# Altium PCB Shield.PcbDoc
Units mm, origin at the board's own origin, x right, y up, seen from the top; angles counter-clockwise.
Board outline 41.78 x 38.9 mm, 2 copper layers (Top Layer, Bottom Layer), stack 1.57 mm thick; 3 components, 17 nets, 201 pads, 0 vias.
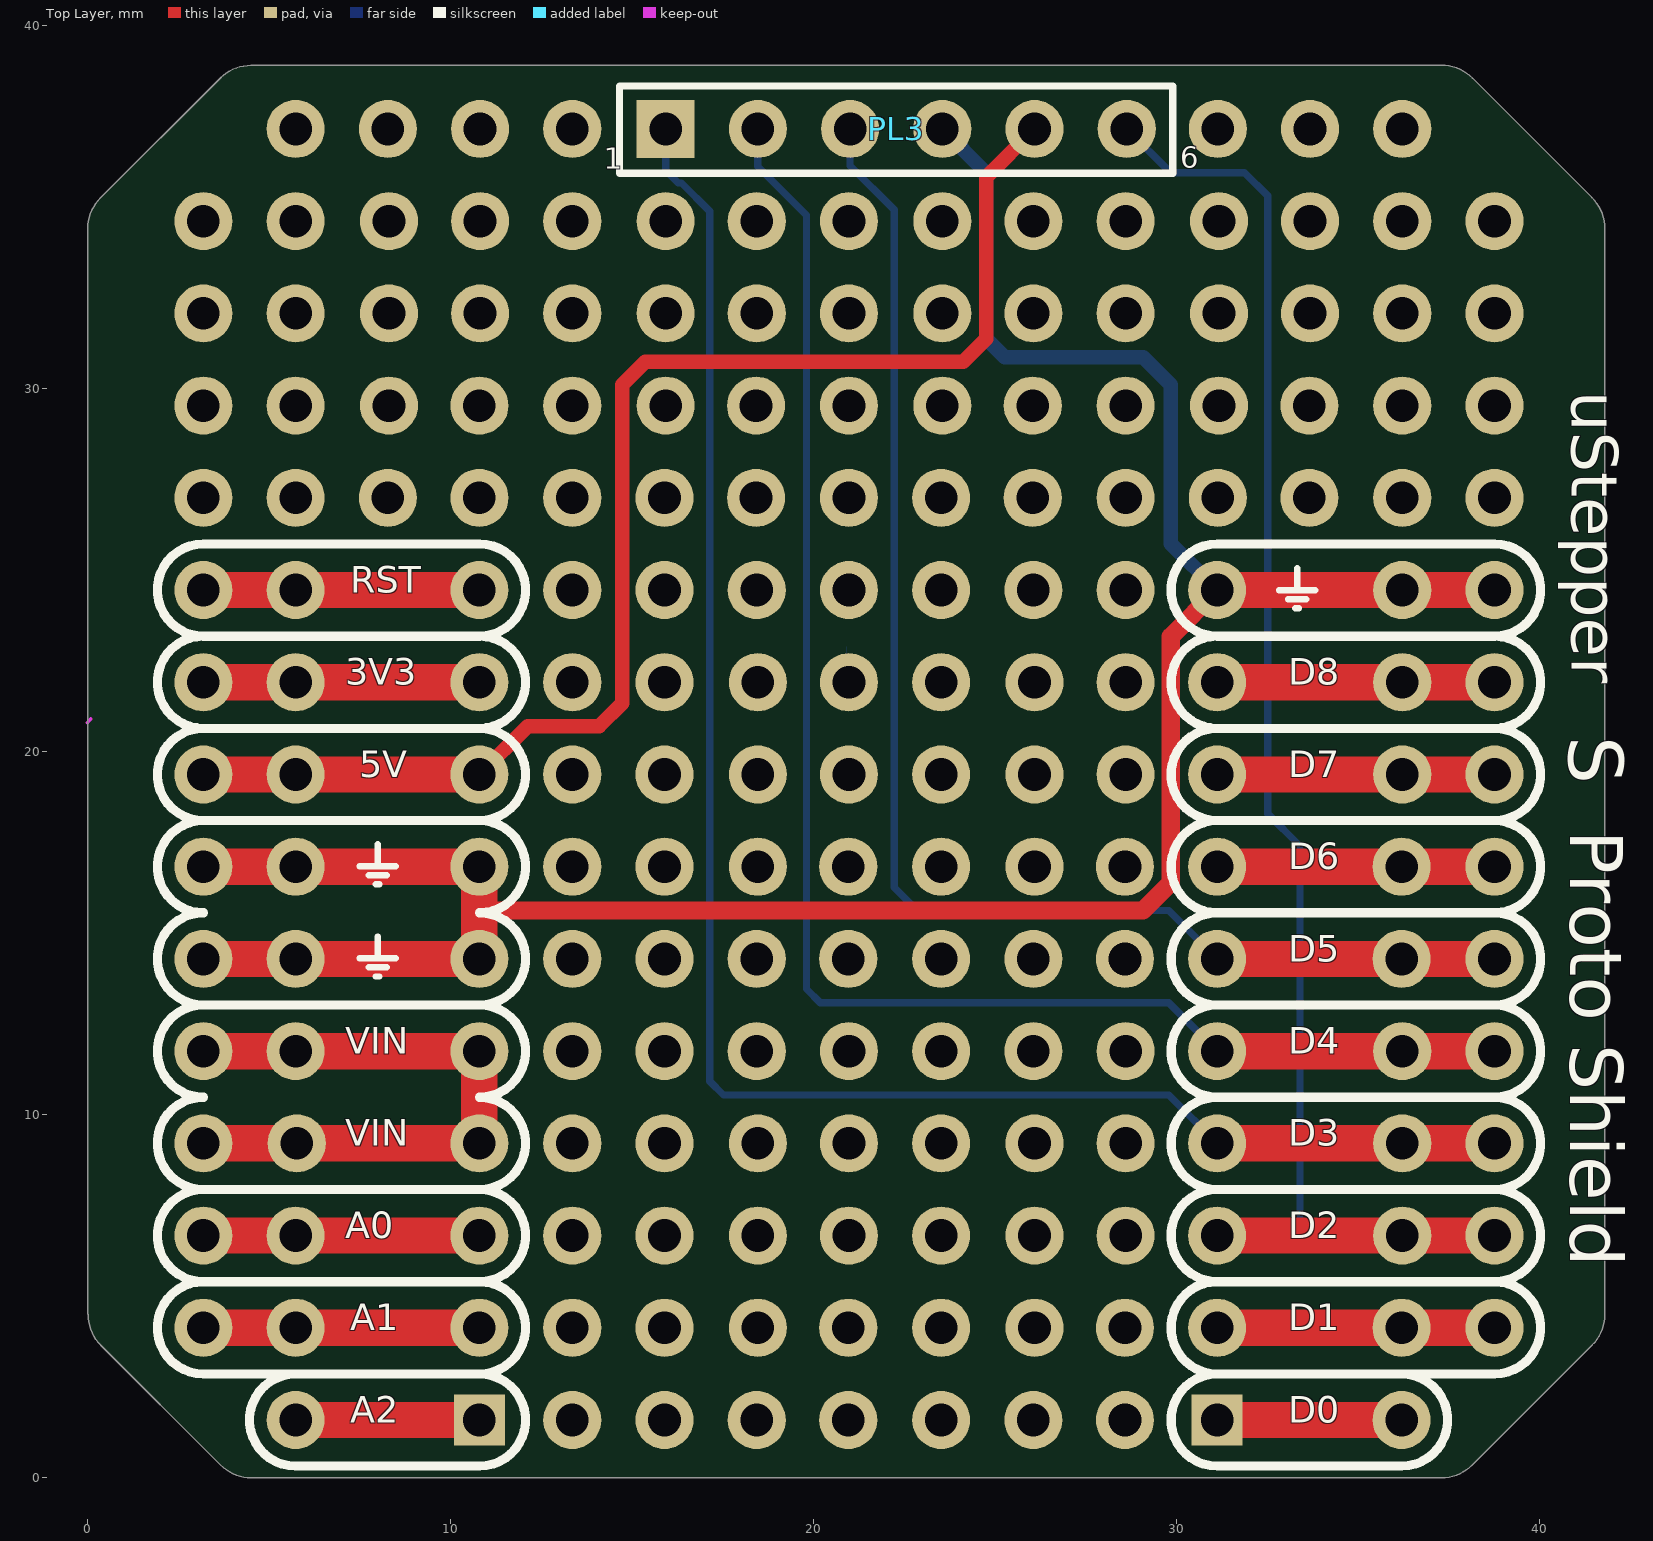
[diagram p0: Top Layer view]
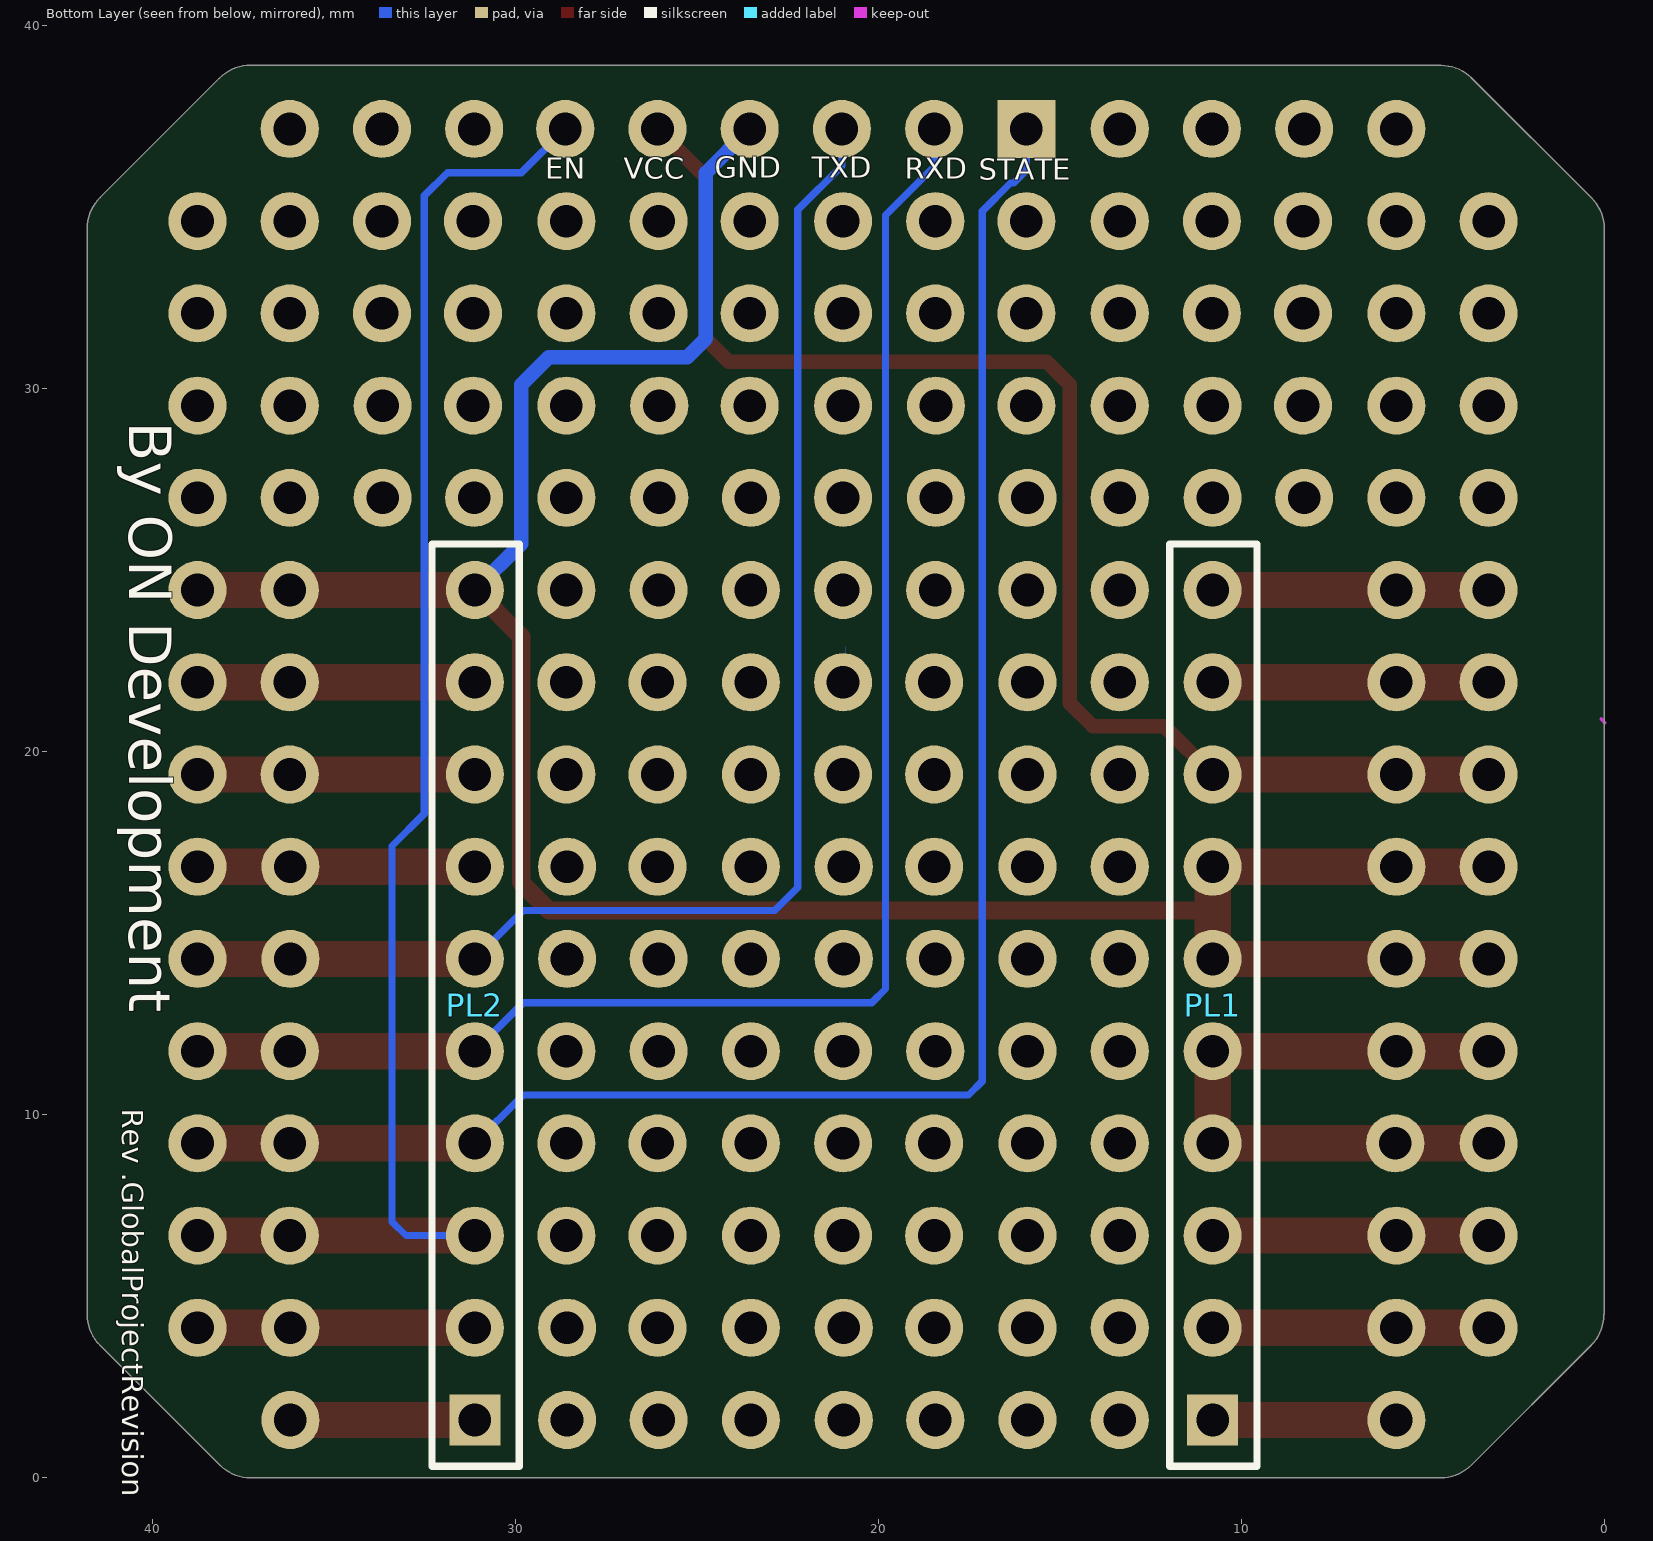
[diagram p1: Bottom Layer view, seen from below]

## Layer stack, top to bottom
Top Solder: solder mask 0.0102, Solder Resist, Dk 3.5
Top Layer: signal copper 0.035
Dielectric 1: core 1.5, FR-4, Dk 4.2
Bottom Layer: signal copper 0.035
Bottom Solder: solder mask 0.0102, Solder Resist, Dk 3.5

## Board outline
0.373,3.651 3.675,0.349 ccw(c4.524,1.207) 4.518,0 37.304,0 ccw(c37.299,1.207) 38.147,0.349 41.45,3.651 ccw(c40.592,4.5) 41.799,4.5 41.799,34.404 ccw(c40.592,34.404) 41.445,35.258 38.152,38.551 ccw(c37.299,37.697) 37.299,38.904 4.52,38.904 4.516,38.9 ccw(c4.516,37.693) 3.662,38.547 0.369,35.254 ccw(c1.223,34.4) 0.016,34.4 0.016,4.508 0.024,4.5 ccw(c1.231,4.5)

## Design rules (kind name [scope] priority, off if disabled: settings)
Clearance [All] p1: gap=0.153 ignorepadtopadclearanceinfootprint=FALSE
ComponentClearance [All] p1: gap=0 collisioncheckmode=3 verticalgap=0 showdistances=FALSE
PolygonConnect [All] p1: connectstyle=Relief reliefconductorwidth=0.254 reliefentries=4 polygonreliefangle="90 Angle" airgapwidth=0.254
RoutingVias [All] p1: holewidth=0.711 width=1.27 viastyle="Through Hole" minholewidth=0.711 minwidth=1.27 maxholewidth=0.711 maxwidth=1.27
SolderMaskExpansion [All] p1: expansion=0.102
Width [All] p1: maxlimit=5 minlimit=0.153 preferedwidth=0.254
29 further rules are at their usual default settings.

## Components (designator, comment, footprint, x,y, rotation, side; value= is the part's Value field where it differs from the comment)
PL1 "10-pin Male Header 2.54mm" "10-pin 2.54mm header" 10.802,13.019 r90 bottom locked
PL2 "10-pin Male Header 2.54mm" "10-pin 2.54mm header" 31.122,13.019 r90 bottom locked
PL3 "6-pin 2.54mm female right angle" "6-pin 2.54mm header - female right angle" 22.282,37.149 r0 top

## Footprints (in the part's own frame and the unit in brackets; to place one, negate y for a bottom-side part, rotate by r counter-clockwise, add the part's x,y. Pads: shape width x height; smd on the part's side, far side on the other; paste and mask are expansions set on the pad)
"6-pin 2.54mm header - female right angle" [mm]
  rect 1.6x1.6 hole 0.9: 1(-6.35,0)
  round 1.6 hole 0.9: 2(-3.81,0) 3(-1.27,0) 4(1.27,0) 5(3.81,0) 6(6.35,0)
  silkscreen extent -7.62,-1.22 7.62,1.18, body extent -7.62,-10.02 10.79,1.91, height 14.8
"10-pin 2.54mm header" [mm]
  rect 1.4x1.4 hole 0.9: 1(-11.43,0)
  round 1.6 hole 0.9: 2(-8.89,0) 3(-6.35,0) 4(-3.81,0) 5(-1.27,0) 6(1.27,0) 7(3.81,0) 8(6.35,0) 9(8.89,0) 10(11.43,0)
  silkscreen extent -12.7,-1.22 12.7,1.18, body extent -12.7,-1.24 12.7,1.24, height 15

## Part data
PL1 PL2: library part CMP-003-0020-0.0, "10 Positions Header Connector 0.100\" (2.54mm) Through Hole Gold"
PL3: library part CMP-003-0023-0.1, "Pin Header 6-pin 2.54mm female right angle"

## Free pads (board coordinates)
  round 1.6 hole 0.9: 2(38.76,34.609) 3(38.76,32.069) 4(38.76,29.529) 5(38.76,26.989) 15(38.76,4.129) 17(38.76,6.669) 18(38.76,9.209) 19(38.76,11.749) 20(38.76,14.289) 21(38.76,16.829) 22(38.76,19.369) 23(38.76,21.909) 24(38.76,24.449) 25(36.22,26.989) 26(36.22,29.529) 27(36.22,32.069) 28(36.22,34.609) 29(36.22,37.149) 30(10.82,37.149) 30(20.98,11.749) 30(20.98,24.449) 30(28.6,11.749) 30(28.6,24.449) 30(33.68,37.149) 30(36.22,11.749) 30(36.22,24.449) 31(10.82,34.609) 31(18.44,34.609) 31(20.98,9.209) 31(20.98,21.909) 31(26.06,34.609) 31(28.6,9.209) 31(28.6,21.909) 31(33.68,34.609) 31(36.22,9.209) 31(36.22,21.909) 32(10.82,32.069) 32(18.44,32.069) 32(20.98,6.669) 32(20.98,19.369) 32(26.06,32.069) 32(28.6,6.669) 32(28.6,19.369) 32(33.68,32.069) 32(36.22,6.669) 32(36.22,19.369) 33(10.802,29.529) 33(18.422,29.529) 33(20.962,4.129) 33(20.962,16.829) 33(26.042,29.529) 33(28.582,4.129) 33(28.582,16.829) 33(33.662,29.529) 33(36.202,4.129) 33(36.202,16.829) 34(10.802,26.989) 34(18.422,26.989) 34(20.962,1.589) 34(20.962,14.289) 34(26.042,26.989) 34(28.582,1.589) 34(28.582,14.289) 34(33.662,26.989) 34(36.202,1.589) 34(36.202,14.289) 35(8.28,37.149) 35(18.44,11.749) 35(18.44,24.449) 35(26.06,11.749) 35(26.06,24.449) 35(31.14,37.149) 36(8.312,34.609) 36(15.932,34.609) 36(18.472,9.209) 36(18.472,21.909) 36(23.552,34.609) 36(26.092,9.209) 36(26.092,21.909) 36(31.172,34.609) 37(8.312,32.069) 37(15.932,32.069) 37(18.472,6.669) 37(18.472,19.369) 37(23.552,32.069) 37(26.092,6.669) 37(26.092,19.369) 37(31.172,32.069) 38(8.312,29.529) 38(15.932,29.529) 38(18.472,4.129) 38(18.472,16.829) 38(23.552,29.529) 38(26.092,4.129) 38(26.092,16.829) 38(31.172,29.529) 39(8.28,26.989) 39(15.9,26.989) 39(18.44,1.589) 39(18.44,14.289) 39(23.52,26.989) 39(26.06,1.589) 39(26.06,14.289) 39(31.14,26.989) 40(3.2,6.669) 40(3.2,16.829) 40(5.74,26.989) 40(13.36,1.589) 40(13.36,14.289) 40(13.36,26.989) 40(15.9,1.589) 40(15.9,14.289) 40(20.98,26.989) 40(23.52,1.589) 40(23.52,14.289) 40(28.6,26.989) 41(3.2,9.209) 41(3.2,19.369) 41(5.74,29.529) 41(13.36,4.129) 41(13.36,16.829) 41(13.36,29.529) 41(15.9,4.129) 41(15.9,16.829) 41(20.98,29.529) 41(23.52,4.129) 41(23.52,16.829) 41(28.6,29.529) 42(3.2,11.749) 42(3.2,21.909) 42(5.74,32.069) 42(13.36,6.669) 42(13.36,19.369) 42(13.36,32.069) 42(15.9,6.669) 42(15.9,19.369) 42(20.98,32.069) 42(23.52,6.669) 42(23.52,19.369) 42(28.6,32.069) 43(3.2,14.289) 43(3.2,24.449) 43(5.74,34.609) 43(13.36,9.209) 43(13.36,21.909) 43(13.36,34.609) 43(15.9,9.209) 43(15.9,21.909) 43(20.98,34.609) 43(23.52,9.209) 43(23.52,21.909) 43(28.6,34.609) 44(5.74,37.149) 44(13.36,11.749) 44(13.36,24.449) 44(13.36,37.149) 44(15.9,11.749) 44(15.9,24.449) 44(23.52,11.749) 44(23.52,24.449) 45(3.2,34.609) 46(3.2,32.069) 47(3.2,29.529) 48(3.2,26.989) 50(3.2,4.129) 53(5.74,1.589) 53(5.74,4.129) 54(5.74,6.669) 55(5.772,9.209) 56(5.74,11.749) 57(5.74,14.289) 58(5.74,16.829) 59(5.74,19.369) 60(5.74,21.909) 61(5.74,24.449)

## Nets (pads, with @x,y where several pads share a name; then routed paths per layer and width w, separated by ;. In a path a pad name is that pad's centre, name@x,y a point inside that pad or via, vN(x,y) a via of type N, cw(c..) or ccw(c..) an arc to the next point about the centre after c; other vN are vias at no path point)
+3V3: pad.42@3.2,21.909 pad.60 PL1.9 | length 7.6
  Top Layer w1: pad.42@3.2,21.909 pad.60 PL1.9
+5V: pad.41@3.2,19.369 pad.59 PL1.8 PL3.5 | length 38
  Top Layer w0.4: PL1.8 12.134,20.701 14.097,20.701 14.732,21.336 14.732,30.099 15.367,30.734 24.13,30.734 24.765,31.369 24.765,35.822 PL3.5
  Top Layer w1: pad.41@3.2,19.369 pad.59 PL1.8
+VIN: pad.41@3.2,9.209 pad.42@3.2,11.749 pad.55 pad.56 PL1.4 PL1.5 | length 17.7
  Top Layer w1: pad.41@3.2,9.209 pad.55 PL1.4 PL1.5 pad.56 pad.42@3.2,11.749
A0: pad.40@3.2,6.669 pad.54 PL1.3 | length 7.6
  Top Layer w1: pad.40@3.2,6.669 pad.54 PL1.3
A1: pad.50 pad.53@5.74,4.129 PL1.2 | length 7.6
  Top Layer w1: pad.50 5.74,4.129 PL1.2
A2: pad.53@5.74,1.589 PL1.1 | length 5.1
  Top Layer w1: pad.53@5.74,1.589 PL1.1
D0: pad.34@36.202,1.589 PL2.1 | length 5.1
  Top Layer w1: PL2.1 pad.34@36.202,1.589
D1: pad.15 pad.33@36.202,4.129 PL2.2 | length 7.6
  Top Layer w1: PL2.2 pad.15
D2: pad.17 pad.32@36.22,6.669 PL2.3 PL3.6 | length 43.3
  Top Layer w1: PL2.3 pad.17
  Bottom Layer w0.2: PL3.6 29.84,35.941 31.877,35.941 32.512,35.306 32.512,18.288 33.401,17.399 33.401,7.05 33.02,6.669 PL2.3
D3: pad.18 pad.31@36.22,9.209 PL2.4 PL3.1 | length 49.1
  Top Layer w1: PL2.4 pad.18
  Bottom Layer w0.2: PL3.1 15.932,36.011 16.281,35.662 16.368,35.662 17.145,34.885 17.145,10.922 17.526,10.541 29.79,10.541 PL2.4
D4: pad.19 pad.30@36.22,11.749 PL2.5 PL3.2 | length 43.9
  Top Layer w1: PL2.5 pad.19
  Bottom Layer w0.2: PL3.2 18.472,36.113 19.812,34.773 19.812,13.462 20.193,13.081 29.79,13.081 PL2.5
D5: pad.20 pad.34@36.202,14.289 PL2.6 PL3.3 | length 38.7
  Top Layer w1: PL2.6 pad.20
  Bottom Layer w0.2: PL3.3 21.012,36.138 22.225,34.925 22.225,16.256 22.86,15.621 29.79,15.621 PL2.6
D6: pad.21 pad.33@36.202,16.829 PL2.7 | length 7.6
  Top Layer w1: PL2.7 pad.21
D7: pad.22 pad.32@36.22,19.369 PL2.8 | length 7.6
  Top Layer w1: PL2.8 pad.22
D8: pad.23 pad.31@36.22,21.909 PL2.9 | length 7.6
  Top Layer w1: PL2.9 pad.23
GND: pad.24 pad.30@36.22,24.449 pad.40@3.2,16.829 pad.43@3.2,14.289 pad.57 pad.58 PL1.6 PL1.7 PL2.10 PL3.4 | length 71.4
  Top Layer w0.5: 10.802,15.559 10.869,15.626 29.08,15.626 29.845,16.391 29.845,23.172 PL2.10
  Top Layer w1: pad.43@3.2,14.289 pad.57 PL1.6 10.802,15.559 PL1.7 pad.58 pad.40@3.2,16.829 ; PL2.10 pad.24
  Bottom Layer w0.4: PL3.4 24.765,35.936 24.765,31.369 25.273,30.861 29.083,30.861 29.845,30.099 29.845,25.726 PL2.10
RST: pad.43@3.2,24.449 pad.61 PL1.10 | length 7.6
  Top Layer w1: pad.43@3.2,24.449 pad.61 PL1.10

## Keep-outs
Keep-Out Layer:
  lines w0.1: 0,20.797 0.1,20.897

## Silkscreen, mask and mechanical layers (free items; w line width, h text height)
Top Overlay:
  lines w0.175: 7.501,14.305 8.001,14.305 ; 7.501,16.845 8.001,16.845 ; 7.751,14.055 8.001,14.055 8.251,14.055 ; 7.751,16.595 8.001,16.595 8.251,16.595 ; 7.951,13.805 8.001,13.805 8.051,13.805 ; 7.951,16.345 8.001,16.345 8.051,16.345 ; 8.001,14.905 8.001,14.305 ; 8.001,17.445 8.001,16.845 ; 8.501,14.305 8.001,14.305 ; 8.501,16.845 8.001,16.845 ; 32.825,24.447 33.325,24.447 ; 33.075,24.197 33.325,24.197 33.575,24.197 ; 33.275,23.947 33.325,23.947 33.375,23.947 ; 33.325,25.047 33.325,24.447 ; 33.825,24.447 33.325,24.447
  lines w0.254: 36.202,2.859 cw(c36.202,1.589) 36.202,0.319 31.122,0.319 cw(c31.122,1.589) 31.122,2.859 ; 39.116,15.559 31.122,15.559 ; 3.2,5.399 ccw(c3.2,4.129) 3.2,2.859 10.802,2.859 ; 3.2,5.399 cw(c3.2,6.669) 3.2,7.939 ; 3.2,5.399 10.802,5.399 ; 3.2,7.939 cw(c3.2,9.209) 3.2,10.479 cw(c3.2,11.749) 3.2,13.019 ; 3.2,7.939 10.802,7.939 ; 3.2,13.019 cw(c3.2,14.289) 3.2,15.559 cw(c3.2,16.829) 3.2,18.099 ; 3.2,13.019 10.802,13.019 ; 3.2,18.099 cw(c3.2,19.369) 3.2,20.639 ; 3.2,18.099 10.802,18.099 ; 3.2,20.639 cw(c3.2,21.909) 3.2,23.179 ; 3.2,20.639 10.802,20.639 ; 3.2,23.179 cw(c3.2,24.449) 3.2,25.719 10.802,25.719 cw(c10.802,24.449) 10.802,23.179 ; 3.2,23.179 10.802,23.179 ; 10.802,2.859 ccw(c10.802,4.129) 10.802,5.399 ; 10.802,2.859 cw(c10.802,1.589) 10.802,0.319 5.74,0.319 cw(c5.74,1.589) 5.74,2.859 10.802,2.859 ; 10.802,5.399 ccw(c10.802,6.669) 10.802,7.939 ; 10.802,7.939 ccw(c10.802,9.209) 10.802,10.479 ccw(c10.802,11.749) 10.802,13.019 ; 10.802,13.019 ccw(c10.802,14.289) 10.802,15.559 ccw(c10.802,16.829) 10.802,18.099 ; 10.802,18.099 ccw(c10.802,19.369) 10.802,20.639 ; 10.802,20.639 ccw(c10.802,21.909) 10.802,23.179 ; 31.122,2.859 cw(c31.122,4.129) 31.122,5.399 ; 31.122,2.859 38.76,2.859 ccw(c38.76,4.129) 38.76,5.399 ; 31.122,5.399 cw(c31.122,6.669) 31.122,7.939 ; 31.122,5.399 38.76,5.399 ; 31.122,7.939 cw(c31.122,9.209) 31.122,10.479 ; 31.122,7.939 38.76,7.939 ; 31.122,10.479 cw(c31.122,11.749) 31.122,13.019 ; 31.122,10.479 38.76,10.479 ; 31.122,13.019 cw(c31.122,14.289) 31.122,15.559 ; 31.122,13.019 38.76,13.019 ; 31.122,15.559 cw(c31.122,16.829) 31.122,18.099 ; 31.122,18.099 cw(c31.122,19.369) 31.122,20.639 ; 31.122,18.099 38.76,18.099 ; 31.122,20.639 cw(c31.122,21.909) 31.122,23.179 ; 31.122,20.639 38.76,20.639 ; 31.122,23.179 cw(c31.122,24.449) 31.122,25.719 38.76,25.719 cw(c38.76,24.449) 38.76,23.179 ; 31.122,23.179 38.76,23.179 ; 38.76,5.399 ccw(c38.76,6.669) 38.76,7.939 ; 38.76,7.939 ccw(c38.76,9.209) 38.76,10.479 ; 38.76,10.479 ccw(c38.76,11.749) 38.76,13.019 ; 38.76,13.019 ccw(c38.76,14.289) 38.76,15.559 ccw(c38.76,16.829) 38.76,18.099 ; 38.76,18.099 ccw(c38.76,19.369) 38.76,20.639 ; 38.76,20.639 ccw(c38.76,21.909) 38.76,23.179
  text "6" at 30.099,35.89 h1
  text "1" at 14.224,35.865 h1
  text "uStepper" at 40.462,29.921 h2.2 r270
  text "RST" at 7.239,24.13 h1.25
  text "3V3" at 7.112,21.59 h1.25
  text "D8" at 33.075,21.59 h1.25
  text "S" at 40.31,20.422 h2.6 r270
  text "5V" at 7.493,19.05 h1.25
  text "D7" at 33.075,19.05 h1.25
  text "Proto Shield" at 40.361,17.831 h2.5 r270
  text "D6" at 33.075,16.51 h1.25
  text "D5" at 33.075,13.97 h1.25
  text "VIN" at 7.112,11.43 h1.25
  text "D4" at 33.075,11.43 h1.25
  text "VIN" at 7.112,8.89 h1.25
  text "D3" at 33.075,8.89 h1.25
  text "A0" at 7.112,6.35 h1.25
  text "D2" at 33.075,6.35 h1.25
  text "A1" at 7.239,3.81 h1.25
  text "D1" at 33.075,3.81 h1.25
  text "A2" at 7.239,1.27 h1.25
  text "D0" at 33.075,1.27 h1.25
Bottom Overlay:
  text "TXD" at 21.844,35.611 h1
  text "GND" at 24.511,35.611 h1
  text "RXD" at 19.279,35.585 h1
  text "VCC" at 27.026,35.585 h1
  text "EN" at 29.185,35.585 h1
  text "STATE" at 17.247,35.56 h1
  text "By ON Development" at 41.021,29.083 h2 r90
  text "Rev .GlobalProjectRevision" at 41.021,10.16 h1 r90
Mechanical 1:
  lines w0.254: 0.016,4.508 0.016,34.4 cw(c1.223,34.4) 0.369,35.254 3.662,38.547 cw(c4.516,37.693) 4.516,38.9 ; 0.024,4.5 ccw(c1.231,4.5) 0.373,3.651 3.675,0.349 ccw(c4.524,1.207) 4.518,0 37.304,0 ccw(c37.299,1.207) 38.147,0.349 41.45,3.651 ccw(c40.592,4.5) 41.799,4.5 41.799,34.404 ccw(c40.592,34.404) 41.445,35.258 38.152,38.551 ccw(c37.299,37.697) 37.299,38.904 4.52,38.904
Mechanical 30:
  circle w0.013: c36.408,36.415 r1.6
  circle w0.013: c5.406,5.415 r1.6
  circle w0.254: c36.4,36.397 r3.002
  circle w0.254: c5.4,5.397 r3.002
  lines w0.013: -2.194,6.015 ccw(c-0.194,6.015) -0.194,4.015 ; -2.194,6.015 ccw(c-0.194,6.015) -0.194,4.015 ; -2.194,6.015 -2.194,35.815 ; -2.194,6.015 -2.194,35.815 ; -2.194,35.815 cw(c-0.194,35.815) -0.194,37.815 ; -2.194,35.815 cw(c-0.194,35.815) -0.194,37.815 ; -0.194,4.015 0.006,4.015 ; -0.194,4.015 0.006,4.015 ; -0.194,37.815 0.006,37.815 ; -0.194,37.815 0.006,37.815 ; -0.094,11.415 ccw(c1.906,11.415) 1.906,9.415 ; -0.094,11.415 ccw(c1.906,11.415) 1.906,9.415 ; -0.094,11.415 -0.094,32.815 ; -0.094,11.415 -0.094,32.815 ; -0.094,32.815 cw(c1.906,32.815) 1.906,34.815 ; -0.094,32.815 cw(c1.906,32.815) 1.906,34.815 ; 0.006,4.015 4.006,0.015 ; 0.006,4.015 4.006,0.015 ; 0.006,37.815 4.006,41.815 ; 0.006,37.815 4.006,41.815 ; 1.906,9.415 5.406,9.415 ; 1.906,9.415 5.406,9.415 ; 1.906,34.815 2.294,34.815 ; 1.906,34.815 2.294,34.815 ; 2.294,34.815 ccw(c5.406,36.415) 4.005,33.208 ; 2.294,34.815 ccw(c5.406,36.415) 4.005,33.208 ; 4.005,33.208 cw(c3.604,32.292) 4.456,32.815 ; 4.005,33.208 cw(c3.604,32.292) 4.456,32.815 ; 4.006,-0.185 ccw(c6.006,-0.185) 6.006,-2.185 ; 4.006,-0.185 ccw(c6.006,-0.185) 6.006,-2.185 ; 4.006,-0.185 4.006,0.015 ; 4.006,-0.185 4.006,0.015 ; 4.006,41.815 4.006,42.015 ; 4.006,41.815 4.006,42.015 ; 4.006,42.015 cw(c6.006,42.015) 6.006,44.015 ; 4.006,42.015 cw(c6.006,42.015) 6.006,44.015 ; 4.006,42.015 4.006,42.015 ; 4.006,42.015 4.006,42.015 ; 4.456,32.815 8.006,32.815 ; 4.456,32.815 8.006,32.815 ; 5.406,9.415 cw(c5.406,5.415) 9.406,5.415 ; 5.406,9.415 cw(c5.406,5.415) 9.406,5.415 ; 6.006,-2.185 35.808,-2.185 ; 6.006,-2.185 35.808,-2.185 ; 6.006,44.015 35.808,44.015 ; 6.006,44.015 35.808,44.015 ; 7.006,39.528 cw(c5.406,36.415) 8.613,37.817 ; 7.006,39.528 cw(c5.406,36.415) 8.613,37.817 ; 7.006,39.528 7.006,39.915 ; 7.006,39.528 7.006,39.915 ; 7.006,39.915 cw(c9.006,39.915) 9.006,41.915 ; 7.006,39.915 cw(c9.006,39.915) 9.006,41.915 ; 8.006,32.815 ccw(c8.006,33.815) 9.006,33.815 ; 8.006,32.815 ccw(c8.006,33.815) 9.006,33.815 ; 8.613,37.817 ccw(c9.53,38.217) 9.006,37.365 ; 8.613,37.817 ccw(c9.53,38.217) 9.006,37.365 ; 9.006,33.815 9.006,37.365 ; 9.006,33.815 9.006,37.365 ; 9.006,41.915 30.408,41.915 ; 9.006,41.915 30.408,41.915 ; 9.406,1.915 ccw(c11.406,1.915) 11.406,-0.085 ; 9.406,1.915 ccw(c11.406,1.915) 11.406,-0.085 ; 9.406,1.915 9.406,5.415 ; 9.406,1.915 9.406,5.415 ; 11.406,-0.085 32.808,-0.085 ; 11.406,-0.085 32.808,-0.085 ; 30.408,41.915 cw(c30.408,39.915) 32.408,39.915 ; 30.408,41.915 cw(c30.408,39.915) 32.408,39.915 ; 32.408,36.415 ccw(c36.408,36.415) 36.408,32.415 ; 32.408,36.415 ccw(c36.408,36.415) 36.408,32.415 ; 32.408,36.415 32.408,39.915 ; 32.408,36.415 32.408,39.915 ; 32.808,-0.085 ccw(c32.808,1.915) 34.808,1.915 ; 32.808,-0.085 ccw(c32.808,1.915) 34.808,1.915 ; 32.808,4.465 cw(c32.285,3.613) 33.201,4.014 ; 32.808,4.465 cw(c32.285,3.613) 33.201,4.014 ; 32.808,4.465 32.808,8.015 ; 32.808,4.465 32.808,8.015 ; 32.808,8.015 cw(c33.808,8.015) 33.808,9.015 ; 32.808,8.015 cw(c33.808,8.015) 33.808,9.015 ; 33.201,4.014 ccw(c36.408,5.415) 34.808,2.302 ; 33.201,4.014 ccw(c36.408,5.415) 34.808,2.302 ; 33.808,9.015 37.358,9.015 ; 33.808,9.015 37.358,9.015 ; 34.808,1.915 34.808,2.302 ; 34.808,1.915 34.808,2.302 ; 35.808,-2.185 ccw(c35.808,-0.185) 37.808,-0.185 ; 35.808,-2.185 ccw(c35.808,-0.185) 37.808,-0.185 ; 35.808,44.015 cw(c35.808,42.015) 37.808,42.015 ; 35.808,44.015 cw(c35.808,42.015) 37.808,42.015 ; 36.408,32.415 39.908,32.415 ; 36.408,32.415 39.908,32.415 ; 37.358,9.015 ccw(c38.21,9.539) 37.81,8.622 ; 37.358,9.015 ccw(c38.21,9.539) 37.81,8.622 ; 37.808,-0.185 37.808,-0.185 ; 37.808,-0.185 37.808,0.015 ; 37.808,-0.185 37.808,0.015 ; 37.808,-0.185 37.808,-0.185 ; 37.808,0.015 41.808,4.015 ; 37.808,0.015 41.808,4.015 ; 37.808,41.815 41.808,37.815 ; 37.808,41.815 37.808,42.015 ; 37.808,41.815 37.808,42.015 ; 37.808,41.815 41.808,37.815 ; 37.81,8.622 cw(c36.408,5.415) 39.521,7.015 ; 37.81,8.622 cw(c36.408,5.415) 39.521,7.015 ; 39.521,7.015 39.908,7.015 ; 39.521,7.015 39.908,7.015 ; 39.908,7.015 ccw(c39.908,9.015) 41.908,9.015 ; 39.908,7.015 ccw(c39.908,9.015) 41.908,9.015 ; 39.908,32.415 cw(c39.908,30.415) 41.908,30.415 ; 39.908,32.415 cw(c39.908,30.415) 41.908,30.415 ; 41.808,4.015 42.008,4.015 ; 41.808,4.015 42.008,4.015 ; 41.808,37.815 42.008,37.815 ; 41.808,37.815 42.008,37.815 ; 41.908,9.015 41.908,30.415 ; 41.908,9.015 41.908,30.415 ; 42.008,4.015 ccw(c42.008,6.015) 44.008,6.015 ; 42.008,4.015 ccw(c42.008,6.015) 44.008,6.015 ; 42.008,37.815 cw(c42.008,35.815) 44.008,35.815 ; 42.008,37.815 cw(c42.008,35.815) 44.008,35.815 ; 44.008,6.015 44.008,35.815 ; 44.008,6.015 44.008,35.815